# EAGLE board Copy of guitar_pickup_wiring circuit by Matheus Lima Titon (EAGLE 9.7.0)

Size 419.64 x 66.85 mm. Coordinates in mm from the lower left corner, seen from the top.
Outline: 0,0 419.64,0 419.64,66.85 0,66.85 0,0
Copper layers (1*16): Top 0.035mm / dielectric 1.5mm / Bottom 0.035mm
Design rules "default": minimum track width 6mil, minimum drill 0.35mm, track to track 6mil, track to pad 6mil, pad to pad 6mil, via to via 6mil, smd to smd 6mil, copper to edge 40mil, drill to drill 6mil, minimum pad ring 10mil, minimum via ring 8mil, stop-mask expansion 4mil, vias tented up to drill 0mil, thermal gap 10mil

## Footprints (pad centres in the part's own frame; a part is rotated, then mirrored left to right if it is on the bottom)
CAP-THRU-2.54MM = drill 1.016 pad 1.88: 1 -1.27,0; 2 1.27,0
BATTERY-GENERIC = drill 1.118 pad 3.15 octagon: + 2.54,0; - -2.54,0
HA-06-SM065 = drill 1 pad 1.676: 1 -2.54,-2.54; 2 0,2.54; 3 2.54,-2.54

## Placement (x,y rotation side)
CHIGHPASS_CAPACITOR  10  [CAP-THRU-2.54MM]  376.93,43.61 180 top
CLOWPASS_CAPACITOR  10  [CAP-THRU-2.54MM]  198.92,60.14 90 top
FUNCPICKUP  FUNCTION-GENERATOR  [BATTERY-GENERIC]  8.26,58.6 270 top
RPOTHIGHPASS_KNOB4  2  [HA-06-SM065]  412.59,56.27 270 top
RPOTLOWPASS_KNOB3  2  [HA-06-SM065]  201.47,48.99 180 top
RPOTVOLUME_KNOB2  250M  [HA-06-SM065]  144.38,7.05 180 top

## Library data of the parts
CHIGHPASS_CAPACITOR CLOWPASS_CAPACITOR FUNCPICKUP RPOTHIGHPASS_KNOB4 RPOTLOWPASS_KNOB3 RPOTVOLUME_KNOB2 = Tinkercad

## Nets
CHIGHPASS_CAPACITOR_1: CHIGHPASS_CAPACITOR.1 RPOTHIGHPASS_KNOB4.2
FUNCPICKUP+: FUNCPICKUP.+ RPOTVOLUME_KNOB2.3
FUNCPICKUP-: CLOWPASS_CAPACITOR.2 FUNCPICKUP.- RPOTHIGHPASS_KNOB4.1
RPOTLOWPASS_KNOB3_P$3: CLOWPASS_CAPACITOR.1 RPOTLOWPASS_KNOB3.3
RPOTVOLUME_KNOB2_P$2: CHIGHPASS_CAPACITOR.2 RPOTLOWPASS_KNOB3.2 RPOTVOLUME_KNOB2.2

## Tracks (layer width: path | path; a pad name or v marks a point on that pad's centre or on a via)
CHIGHPASS_CAPACITOR_1  (1 unrouted)
FUNCPICKUP+  (1 unrouted)
FUNCPICKUP-  (2 unrouted)
RPOTLOWPASS_KNOB3_P$3  (1 unrouted)
RPOTVOLUME_KNOB2_P$2  (2 unrouted)